# Altium PCB PCB1.PcbDoc
Units mil, origin at the board's own origin, x right, y up, seen from the top; angles counter-clockwise.
Board outline 6000 x 4000 mil, 2 copper layers (Top Layer, Bottom Layer); 48 components, 44 nets, 163 pads, 14 vias.
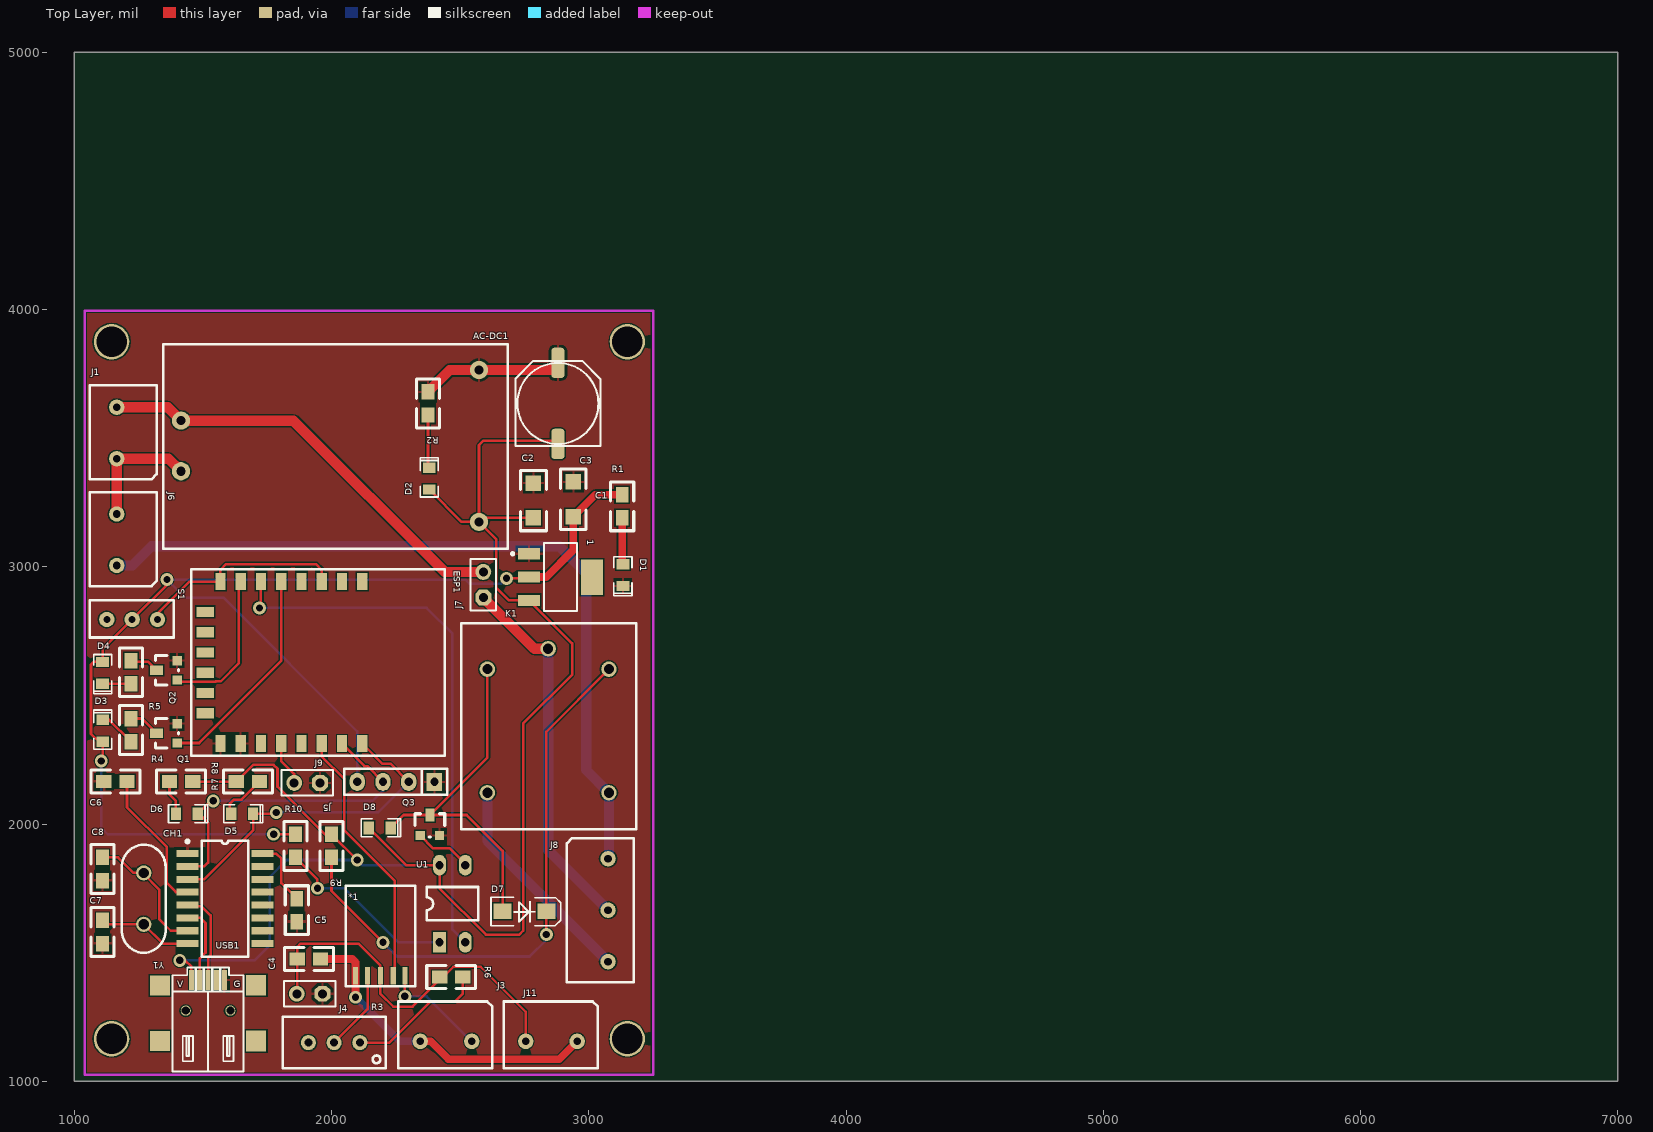
[diagram p0: Top Layer view]
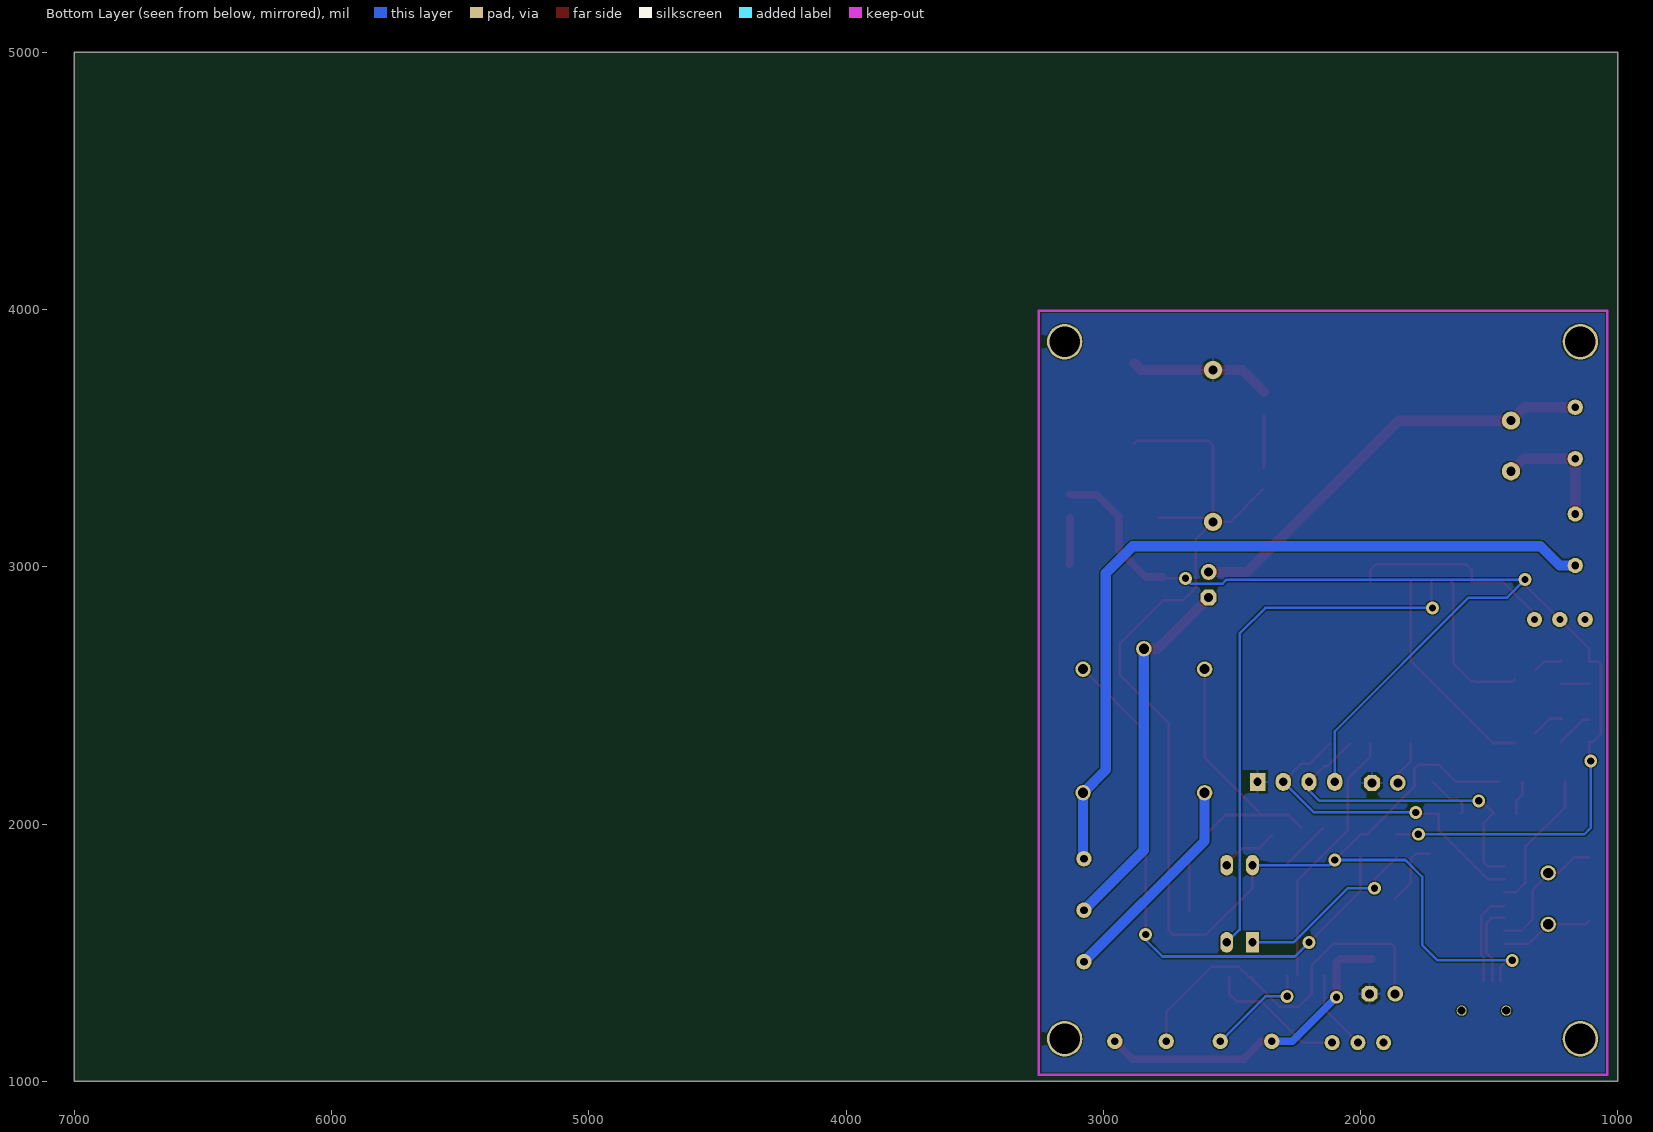
[diagram p1: Bottom Layer view, seen from below]

## Layer stack, top to bottom
Top Solder: solder mask 0.4, Solder Resist, Dk 3.5
Top Layer: signal copper 1.4
Dielectric 1: dielectric 12.6, FR-4, Dk 4.8
Bottom Layer: signal copper 1.4
Bottom Solder: solder mask 0.4, Solder Resist, Dk 3.5

## Board outline
1000,1000 7000,1000 7000,5000 1000,5000

## Design rules (kind name [scope] priority, off if disabled: settings)
Clearance [All] p1: gap=5
PolygonConnect [All] p1: connectstyle=Relief reliefconductorwidth=10 reliefentries=4 polygonreliefangle="90 Angle" airgapwidth=10
RoutingVias [All] p1: holewidth=28 width=50 viastyle="Through Hole" minholewidth=28 minwidth=50 maxholewidth=200 maxwidth=200
SilkToBoardRegionClearance [All] p1 off:
SilkToSilkClearance [All] p1: silktosilkclearance=1
SilkToSolderMaskClearance [IsPad] p1: minsilkscreentomaskgap=1 clearancetoexposedcopper=TRUE
SolderMaskExpansion [All] p1: expansion=4
Width [All] p1: maxlimit=100 minlimit=10 preferedwidth=10
26 further rules are at their usual default settings.

## Components (designator, comment, footprint, x,y, rotation, side; value= is the part's Value field where it differs from the comment)
1 "AMS1117" SOT223 2890,2960 r270 top
*1 "AMC7140" TO-252-5L 2190,1410 r0 top
AC-DC1 "220—5" POWER-220_5 2010,3480 r0 top
C1 "Cap" 1206 2940,3195 r90 top
C2 "Cap" 1206 2785,3190 r90 top
C3 "Cap" "CAP-E SMD 8X8" 2880,3635 r270 top
C4 "Cap" 0805 1957,1475 r180 top
C5 "Cap" 0805 1865,1710 r270 top
C6 "Cap" 0805 1205,2165 r180 top
C7 "Cap" 0805 1110,1535 r90 top
C8 "Cap" 0805 1110,1780 r90 top
CH1 "CH340G" SOP16 1440,1885 r0 top
D1 "LED0" LED0805 3132.61,3010 r270 top
D2 "LED0" LED0805 2380,3300 r90 top
D3 "LED0" LED0805 1110.79,2320 r90 top
D4 "LED0" LED0805 1110,2630 r270 top
D5 "LED0" LED0805 1610,2040 r0 top
D6 "LED0" LED0805 1395,2040 r0 top
D7 "1N5819" DO-214AC/SMA 2750,1660 r0 top
D8 "LED1" LED0805 2145,1985 r0 top
ESP1 "ESP8266-12E" ESP8266 2080,2785 r270 top
J1 "CON2" TML-2-5.08 1640,3730 r270 top
J3 "CON2" TML-2-5.08 2645,1630 r0 top
J4 "CON2" HDR1X2 1965,1340 r180 top
J5 "CON2" HDR1X2 1955,2160 r180 top
J6 "CON2" TML-2-5.08 1640,3315 r270 top
J7 "CON2" HDR1X2 2590,2880 r90 top
J8 "CON3" TML-3-5.08 3075,1665 r90 top
J9 "CON4" SIP4 2250,2164 r180 top
J11 "CON2" TML-2-5.08 2235,1630 r0 top
K1 "Relay-SPDT" 5V-5 2665,2640 r0 top
Q1 "SS8050" SOT-23 1400,2315 r90 top
Q2 "SS8050" SOT-23 1400,2560 r90 top
Q3 "SS8050" SOT-23 2345,1955 r0 top
R1 "Res" 0805 3130,3190 r90 top
R2 "Res" 0805 2375,3680 r270 top
R3 "Res Adj1" "RES ADJ-3296W" 2010,1150 r90 top
R4 "Res" 0805 1220,2410 r270 top
R5 "Res" 0805 1220,2635 r270 top
R6 "Res" 0805 2420,1405 r0 top
R7 "Res" 0805 1720,2165 r180 top
R8 "Res" 0805 1370,2165 r0 top
R9 "Res" 0805 2000,1960 r270 top
R10 "Res" 0805 1860,1870 r90 top
S1 "SW-SPDT" SS12D00G3 1225,2795 r0 top
U1 "Optoisolator1" DIP4 2420,1540 r90 top
USB1 "USB" USB-MINI 1520,1230 r0 top
Y1 "XTAL" XTAL 1270,1810 r270 top

## Footprints (in the part's own frame and the unit in brackets; to place one, negate y for a bottom-side part, rotate by r counter-clockwise, add the part's x,y. Pads: shape width x height; smd on the part's side, far side on the other; paste and mask are expansions set on the pad)
5V-5 [mm]
  round 1.524 hole 1: 1(4.5,1.05) 2(-1.5,-0.965) 3(10.5,-0.965) 4(-1.5,-13.17) 5(10.5,-13.17)
  silkscreen extent -4.06,-16.76 13.21,3.56
0805 [mil]
  rect 60x50 smd: 1(0,0) 2(90,0)
  silkscreen extent -50,-45 140,45
1206 [mil]
  rect 60x60 smd: 1(0,0) 2(135,0)
  silkscreen extent -50,-50 185,50
"CAP-E SMD 8X8" [mm]
  rrect50% 3x1.3 smd: 1(-4,0) 2(4,0)
  silkscreen extent -4.2,-4.2 4.2,4.2, body extent -4.52,-4.22 4.48,4.08, height 10.5
DIP4 [mil]
  rect 80x50 hole 32: 1(0,0)
  oval 80x50 hole 32: 2(0,-100) 3(300,-100) 4(300,0)
  silkscreen extent 85,-150 215,50
DO-214AC/SMA [mil]
  rect 70x60 smd: 1(-85,0) 2(85,0)
  silkscreen extent -130,-55 141,55
ESP8266 [mm]
  rect 1.7x1.02 smd: 1(-4,1) 2(-4,-1) 3(-4,-3) 4(-4,-5) 5(-4,-7) 6(-4,-9) 7(-4,-11) 8(-4,-13) 15(12,-13) 16(12,-11) 17(12,-9) 18(12,-7) 19(12,-5) 20(12,-3) 21(12,-1) 22(12,1)
  rect 1.02x1.7 smd: 9(-1,-14.5) 10(1,-14.5) 11(3,-14.5) 12(5,-14.5) 13(7,-14.5) 14(9,-14.5)
  silkscreen extent -5.21,-15.88 13.21,9.14
HDR1X2 [mil]
  oct 62x62 hole 35: 1(0,0)
  round 62 hole 35: 2(100,0)
  silkscreen extent -50,-50 150,50
LED0805 [mil]
  rect 40x50 smd: 1(0,0) 2(85,0)
  silkscreen extent -29,-35 123,35, body extent 3,-24 83,25, height 43
POWER-220_5 [mm]
  round 1.8 hole 0.9: 1(-15.113,-2.762) 2(-15.113,2.238) 3(14.307,-7.762) 4(14.307,7.238)
  silkscreen extent -16.89,-10.41 17.14,9.78
"RES ADJ-3296W" [mm]
  round 1.5 hole 0.8: 1(0,-2.54) 2(0,0) 3(0,2.54)
  silkscreen extent -2.54,-5.08 2.54,5.08, body extent -2.41,-4.76 2.42,4.76, height 11.55
SIP4 [mil]
  rect 60x70 hole 32: 1(-150,0)
  oval 60x70 hole 32: 2(-50,0) 3(50,0) 4(150,0)
  silkscreen extent -200,-50 200,50
SOP16 [mm]
  rect 2.2x0.7 smd: 1(0,0) 2(0,-1.27) 3(0,-2.54) 4(0,-3.81) 5(0,-5.08) 6(0,-6.35) 7(0,-7.62) 8(0,-8.89) 9(7.4,-8.89) 10(7.4,-7.62) 11(7.4,-6.35) 12(7.4,-5.08) 13(7.4,-3.81) 14(7.4,-2.54) 15(7.4,-1.27) 16(7.4,0)
  silkscreen extent -0.15,-10.17 6,1.35
SOT223 [mm] "SOT-223/SC-73; 4 Leads; Body 6.7 x 7.3 mm, inc. leads (LxW max)"
  rect 1.1x2.15 smd: 1(-2.3,-3.1) 2(0,-3.1) 3(2.3,-3.1)
  rect 3.5x2.15 smd: 4(0,3.1)
  silkscreen extent -3.35,-4.85 3.35,1.63
SOT-23 [mil]
  rect 36x36 smd: 1(0,0) 2(75,0)
  rect 36x50 smd: 3(38,80)
  silkscreen extent -20,-5 95,85
SS12D00G3 [mil]
  round 60 hole 27.56: 1(-98.43,0) 2(0,0) 3(98.43,0)
  silkscreen extent -165,-70 161,75
TML-2-5.08 [mil]
  round 60 hole 30: 1(110,-475) 2(310,-475)
  silkscreen extent 25,-580 390,-320
TML-3-5.08 [mil]
  round 60 hole 30: 1(-200,0) 2(0,0) 3(200,0)
  silkscreen extent -280,-100 280,160
TO-252-5L [mm]
  rect 0.5x1.7 smd: 1(-2.45,0) 2(-1.27,0) 3(0,0) 4(1.27,0) 5(2.45,0)
  silkscreen extent -3.43,-1.02 3.43,8.89
USB-MINI [mm]
  rect 2x2 smd: 0(-4.746,-1.872) 0(-4.746,3.612)
  round 1 hole 0.8: 0(-2.2,1.128) 0(2.2,1.128)
  rect 2x2.032 smd: 0(4.746,-1.872) 0(4.746,3.628)
  rect 0.52x2 smd: 1(-1.626,4.166) 2(-0.813,4.166) 3(0,4.166) 4(0.813,4.166) 5(1.626,4.166)
  silkscreen extent -3.5,-4.87 3.5,5.38, body extent -5.32,-4.63 5.38,4.57, height 3.95
XTAL [mm]
  round 1.5 hole 1.002: 1(0,0) 2(5.08,0)
  silkscreen extent -2.79,-2.16 7.9,2.16

## Part data
C1 C2 C3 C4 C5 C6 C7 C8: "Capacitor"
D1 D2 D3 D4 D5 D6: "Typical INFRARED GaAs LED"
D7: library part Diode, "Default Diode"
D8: "Typical RED GaAs LED"
ESP1: library part ESP8266
J1 J3 J4 J5 J6 J7 J8 J9 J11: "Connector"
K1: "Single-Pole Dual-Throw Relay"
Q1 Q2 Q3: library part 2N3904, "NPN General Purpose Amplifier"
R1 R2 R4 R5 R6 R7 R8 R9 R10: "Resistor"
R3: "Variable Resistor"
S1: "SPDT Subminiature Toggle Switch, Right Angle Mounting, Vertical Actuation"
U1: "4-Pin Phototransistor Optocoupler"
USB1: library part miniUSB-b
Y1: "Crystal Oscillator"

## Free pads (board coordinates)
  round 137.8 hole 118.11: ""(1145,1165) ""(1145,3875) ""(3150,1165) ""(3150,3875)

## Via types
v1: diameter 50, hole 28, Top Layer to Bottom Layer, 14 vias

## Nets (pads, with @x,y where several pads share a name; then routed paths per layer and width w, separated by ;. In a path a pad name is that pad's centre, name@x,y a point inside that pad or via, vN(x,y) a via of type N, cw(c..) or ccw(c..) an arc to the next point about the centre after c; other vN are vias at no path point)
48V: *1.1 C4.1 J3.2 J11.1 | length 1267.6
  Top Layer w30: C4.1 2080,1475 2093.54,1461.46 *1.1 v1(2093.54,1326.46) ; J11.1 2385,1155 2455,1085 2885,1085 J3.2
  Bottom Layer w30: v1(2093.54,1326.46) 2265,1155 J11.1
220L: AC-DC1.2 J1.1 J7.2 | length 1690.1
  Top Layer w40: J1.1 1363.11,3620 AC-DC1.2 1851.89,3568.11 2440,2980 J7.2
220L_OUT: J6.2 J8.3 K1.5 | length 3047.6
  Bottom Layer w40: J6.2 1225,3005 1300,3080 2885,3080 2990,2975 2990,2209.88 K1.5 3078.39,1868.39 J8.3
220N: AC-DC1.1 J1.2 J6.1 | length 485.2
  Top Layer w40: J6.1 J1.2 1366.26,3420 AC-DC1.1
340GR: CH1.3 D5.2 ESP1.22 J9.2 | length 1297.2
  Top Layer w10: CH1.3 1505,1785 1695,1975 D5.2 1780,2040 v1(1785,2045) ; ESP1.22 2196.93,2235 2229,2235 J9.2
  Bottom Layer w10: v1(1785,2045) 2181,2045 J9.2
340GT: CH1.2 D6.2 ESP1.21 J9.3 | length 1307.9
  Top Layer w10: CH1.2 1505,1835 1520,1850 1520,2005 1485,2040 D6.2 1530,2090 v1(1540,2090) ; ESP1.21 2128.19,2225 2139,2225 J9.3
  Bottom Layer w10: v1(1540,2090) 2160,2090 2200,2130 J9.3
ADC: ESP1.1
AMC_OUT: *1.5 J11.2 | length 413.1
  Top Layer w10: v1(2285,1330) 2285,1408.54 *1.5
  Bottom Layer w10: v1(2285,1330) 2370,1330 J11.2
COM: J7.1 J8.2 K1.1 | length 1447.2
  Top Layer w40: J7.1 2788.66,2681.34 K1.1
  Bottom Layer w40: K1.1 2842.17,1897.83 J8.2
D+: CH1.5 USB1.3 | length 366.7
  Top Layer w10: CH1.5 1445,1680 1495,1680 1530,1645 1530,1490 1520,1480 USB1.3@1520,1389
D-: CH1.6 USB1.2 | length 316.3
  Top Layer w10: CH1.6 1495,1635 1495,1630 1510,1615 1510,1500 1488,1478 USB1.2@1488,1389
GND: 1.1 AC-DC1.4 C1.2 C2.2 C3.1 C5.2 C6.2 C7.1 C8.1 CH1.1 D1.2 ESP1.15 ESP1.16 J4.1 J5.1 J9.1 Q1.2 Q2.2 Q3.2 R2.1 USB1.5 | length 551.6
  Top Layer w40: R2.1 2459.96,3764.96 AC-DC1.4 2852.48,3764.96 C3.1
GND_L: *1.3 C4.2 J3.1 J4.2 R6.1 | length 1499.7
  Top Layer w10: J4.2 1867,1342 C4.2 1867,1522 1880,1535 2105,1535 2190,1450 *1.3 2190,1340 2240,1290 2315,1290 2420,1395 R6.1 2433.79,1405 2473.79,1445 2580,1445 2755,1270 J3.1
IO0: ESP1.18 J5.2 | length 173.5
  Top Layer w10: ESP1.18 1804.41,2245.59 1855,2195 J5.2
IO2: ESP1.17
IO4: ESP1.19
IO5: *1.4 ESP1.20 | length 1021.9
  Top Layer w10: ESP1.20 1961.89,2263.11 2050,2175 2050,1975 2245,1780 2245,1415 *1.4
IO12: ESP1.6 U1.2 | length 2117
  Top Layer w10: v1(1720,2840) 1725.67,2845.67 ESP1.6
  Bottom Layer w10: v1(1720,2840) 2370,2840 2470,2740 2470,1590 U1.2
IO13: ESP1.7 Q2.1 | length 593
  Top Layer w10: Q2.1 1406.93,2553.07 1548.81,2553.07 1550.74,2555 1570,2555 1640,2625 1640,2935.55 ESP1.7
IO14: ESP1.5 Q1.1 | length 844.8
  Top Layer w10: Q1.1 1485,2315 1804.41,2634.41 ESP1.5
IO16: ESP1.4
Net*1_2: *1.2 R3.2 | length 313.8
  Top Layer w10: R3.2 2140,1280 *1.2
NetC5_1: C5.1 CH1.16 | length 261.8
  Top Layer w10: CH1.16 1785,1885 1805,1865 1805,1770 C5.1
NetC6_1: C6.1 CH1.4 | length 553.7
  Top Layer w10: C6.1 1205,2065 1360,1910 1360,1770 1395,1735 CH1.4
NetC7_2: C7.2 CH1.8 Y1.2 | length 367.3
  Top Layer w10: C7.2 1125,1610 Y1.2 1345,1535 CH1.8
NetC8_2: C8.2 CH1.7 Y1.1 | length 518.3
  Top Layer w10: C8.2 1170,1870 1230,1810 Y1.1 1270,1805 1330,1745 1330,1630 1375,1585 CH1.7
NetD1_1: D1.1 R1.1 | length 181.1
  Top Layer w30: R1.1 3130,3012.61 D1.1
NetD2_2: D2.2 R2.2 | length 207.1
  Top Layer w10: R2.2 2375,3390 D2.2
NetD3_2: D3.2 R4.2 | length 144.4
  Top Layer w10: D3.2 1135,2405 R4.2
NetD4_2: D4.2 R5.2 | length 110
  Top Layer w10: D4.2 R5.2
NetD5_1: D5.1 R7.1 | length 192.3
  Top Layer w10: D5.1 1605,2045 1605,2080 1620,2095 1650,2095 R7.1
NetD6_1: D6.1 R8.1 | length 135.4
  Top Layer w10: R8.1 1370,2115 1395,2090 D6.1
NetD7_1: D7.1 D8.2 K1.2 Q3.3 | length 1408
  Top Layer w10: D8.2 2280,2035 Q3.3 ; K1.2 2605.94,2257.94 Q3.3 ; D7.1 2665,1895 2525,2035 Q3.3
NetD7_2: D7.2 K1.3 R9.2 | length 2250.4
  Top Layer w10: R9.2 2000,1740 v1(2200,1540) ; v1(2835,1570) D7.2 2835,2358.62 K1.3
  Bottom Layer w10: v1(2200,1540) 2255,1485 2770,1485 2835,1550 v1(2835,1570)
NetESP1_3: ESP1.3 ESP1.8 S1.3 | length 822.7
  Top Layer w10: S1.3 1323.43,2818.43 1447.48,2942.48 ESP1.8 1568.19,2988.19 1590,3010 1940,3010 1961.89,2988.11 ESP1.3
NetQ1_3: Q1.3 R4.1 | length 123.6
  Top Layer w10: R4.1 1263,2410 Q1.3
NetQ2_3: Q2.3 R5.1 | length 115.3
  Top Layer w10: R5.1 1225,2630 1288,2630 Q2.3
NetQ3_2: Q3.1 U1.3 | length 225.6
  Top Layer w10: Q3.1 2395,1905 2460,1905 2520,1845 U1.3
NetR3_1: R3.1 R6.2 | length 543.7
  Top Layer w10: R3.1 2225,1150 2385,1310 2480,1310 2510,1340 R6.2
NetR10_1: R10.1 U1.1 | length 717.2
  Top Layer w10: R10.1 1945,1785 v1(1945,1750)
  Bottom Layer w10: v1(1945,1750) 2050,1750 2260,1540 U1.1
NO: J8.1 K1.4 | length 850.8
  Bottom Layer w40: K1.4 2605.94,1934.06 J8.1
RST: ESP1.2
VCC_3.3V: 1.2 C1.1 D3.1 D4.1 J9.4 R1.2 R10.2 S1.2 | length 5080.1
  Top Layer w10: v1(1105,2245) 1110.79,2250.79 D3.1 1095,2320 1065,2350 1065,2620 1075,2630 D4.1 1110,2680 S1.2 1360,2930 v1(1360,2950) ; v1(1775,1960) R10.2 ; v1(2680,2955) 2762.95,2955 1.2
  Top Layer w30: 1.2 2835,2960 2940,3065 C1.1 3025,3280 R1.2
  Bottom Layer w10: v1(1105,2245) 1105,1985 1130,1960 v1(1775,1960) ; J9.4 2100,2360 1580,2880 1430,2880 v1(1360,2950) 2520,2950 2536,2934 2659,2934 v1(2680,2955)
VCC_5V: 1.3 AC-DC1.3 C2.1 C3.2 D2.1 D8.1 R7.2 R8.2 R9.1 U1.4 USB1.1 | length 6111.7
  Top Layer w10: v1(1410,1470) 1430.7,1470 1455.2,1445.5 USB1.1@1456,1389 ; R8.2 R7.2 1695,2230 1775,2230 1790,2215 1790,2145 1975,1960 R9.1 v1(2100,1860) ; D8.1 2290,1840 U1.4 2420,1750 2600,1570 2730,1570 2745,1585 2745,2390 2935,2580 2935,2702.4 1.3 2690.55,2869.45 2640,2920 2640,3107.68 AC-DC1.3 ; D2.1 2505.59,3174.41 AC-DC1.3 ; C2.1 2588.86,3190 AC-DC1.3 ; C3.2 2867.52,3490 2590,3490 2573.27,3473.27 AC-DC1.3
  Bottom Layer w10: v1(1410,1470) 1700,1470 1760,1530 1760,1795 1825,1860 v1(2100,1860) 2120,1840 U1.4 U1.4@2400,1860
pads on no net: 1.4 CH1.9 CH1.10 CH1.11 CH1.12 CH1.13 CH1.14 CH1.15 ESP1.9 ESP1.10 ESP1.11 ESP1.12 ESP1.13 ESP1.14 R3.3 S1.1 USB1.0 USB1.4

## Polygon pours and split planes (outlines as drawn)
GND on Bottom Layer "Top Layer" (solid, remove dead copper, pour order 10): 1040,3995 3240,3995 3240,1035 3250,1025 1040,1025
GND on Top Layer "Top Layer" (solid, remove dead copper, pour order 12): 1040,1025 3250,1025 3250,3995 1040,3995

## Keep-outs
Keep-Out Layer:
  lines w10: 1040,1025 3250,1025 3250,3995 1040,3995 1040,1025

## Text inside footprints (layer, text, board x,y; h text height)
USB1: Top Overlay "G" at 1619,1365 h25; Top Overlay "V" at 1400,1365 h25